# Altium PCB LEOPARD_HD4.PcbDoc (part 1 of 3)
Units mil, origin at the board's own origin, x right, y up, seen from the top; angles counter-clockwise.
Board outline 2678.03 x 1898.03 mil, 4 copper layers (L1, L2, L3, L4), stack 207.302 mil thick; 147 components, 116 nets, 618 pads, 284 vias.
Unrouted connection lines stored in the file: 3.
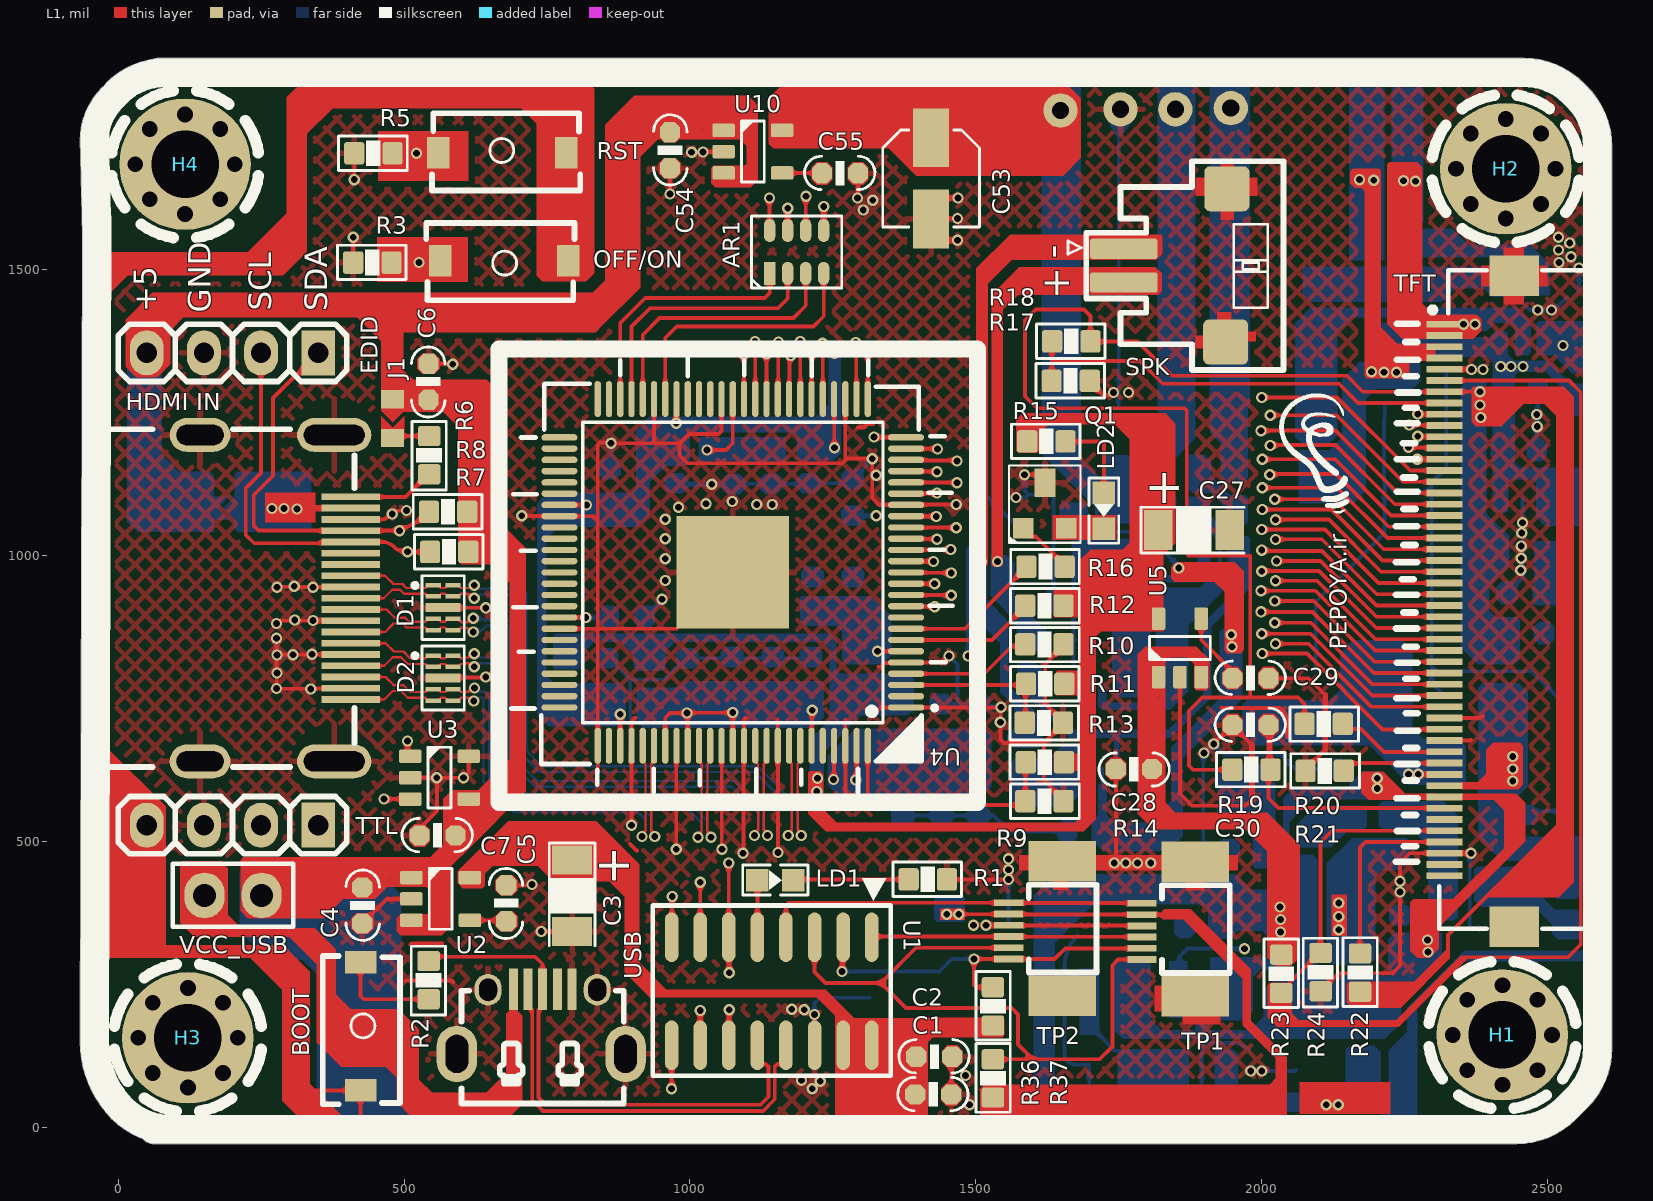
[diagram p0: L1 view]
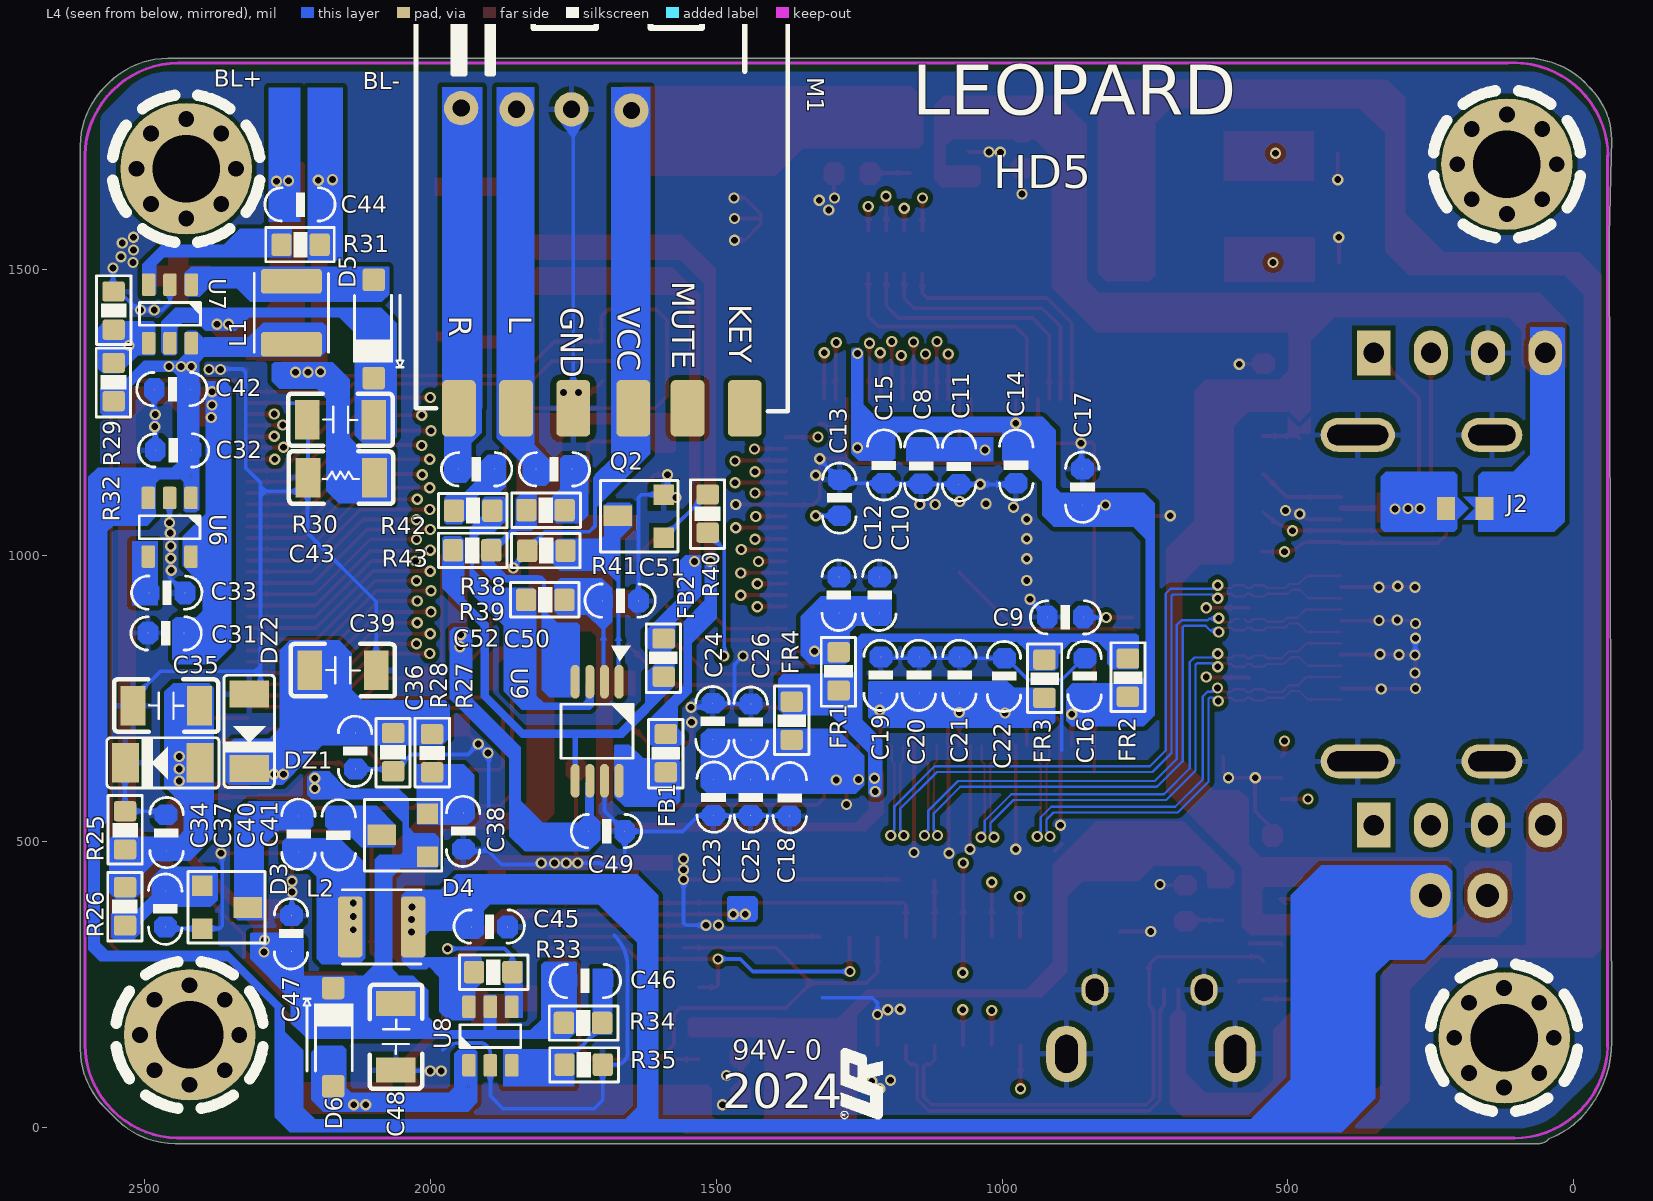
[diagram p1: L4 view, seen from below]
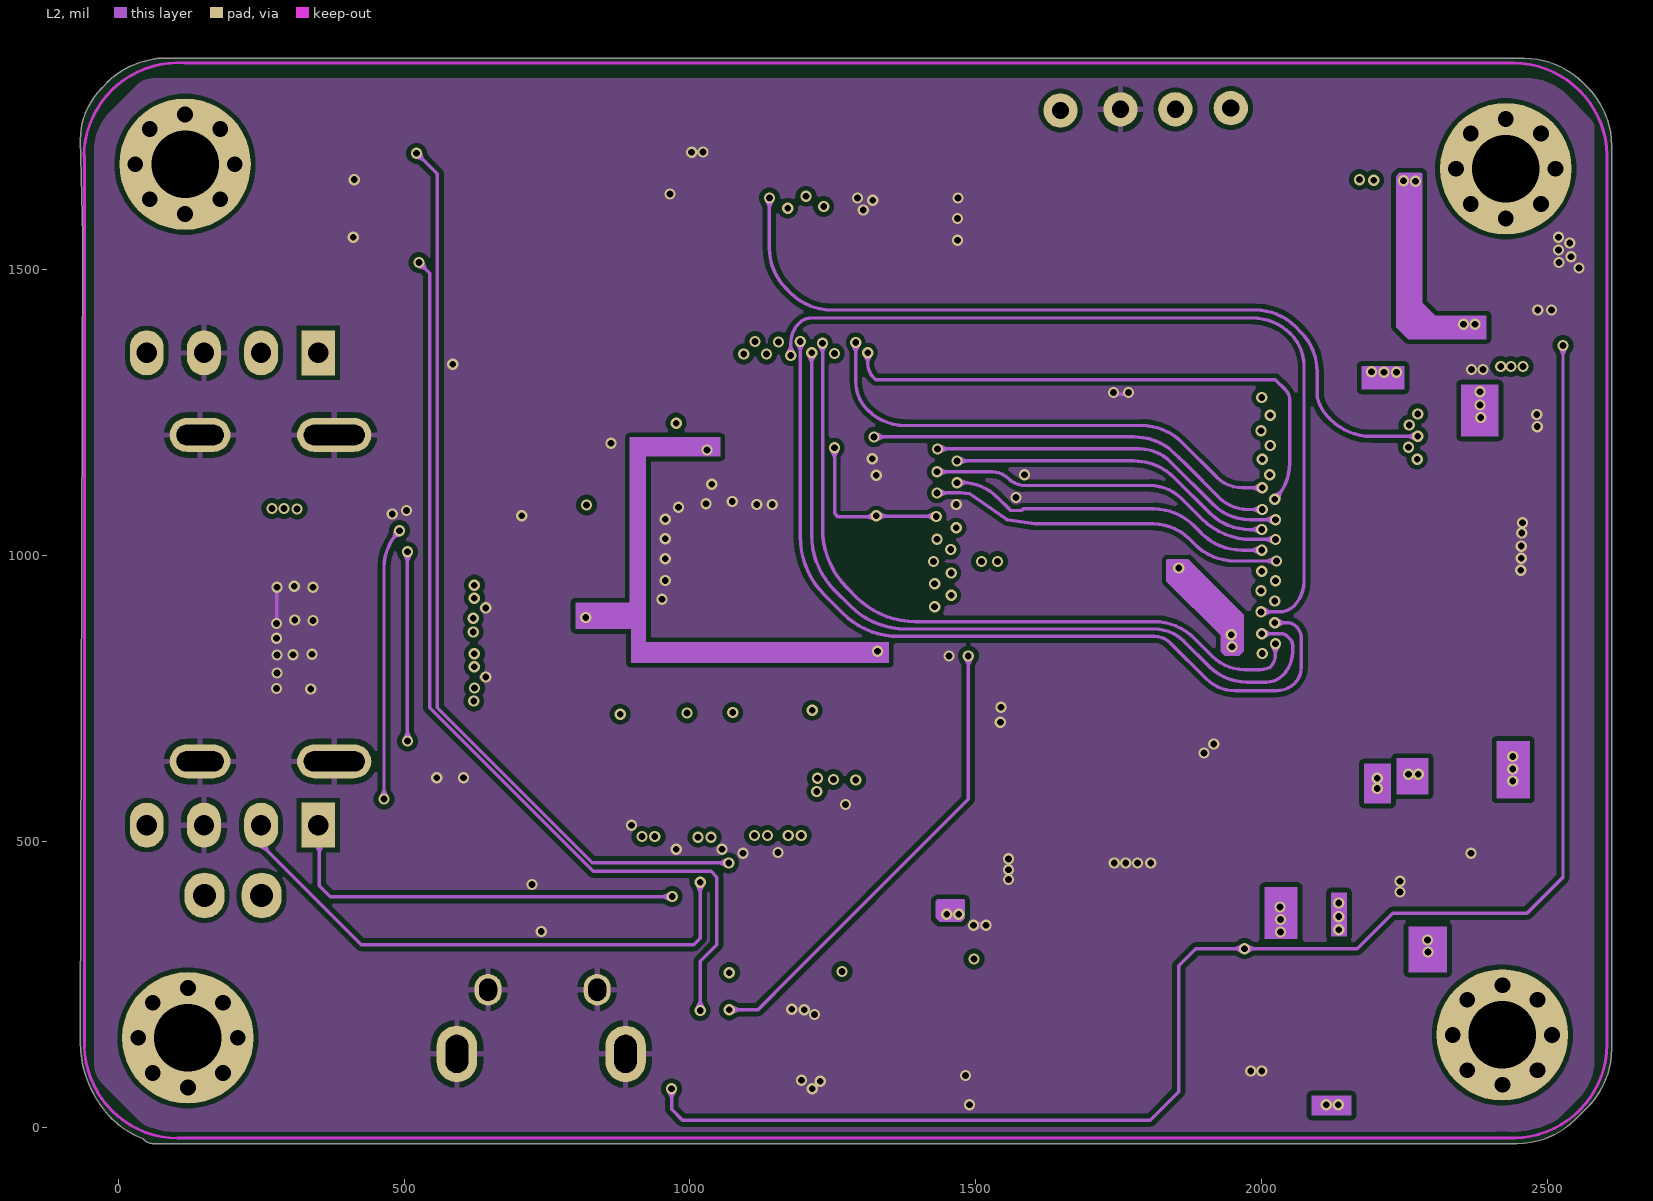
[diagram p2: L2]
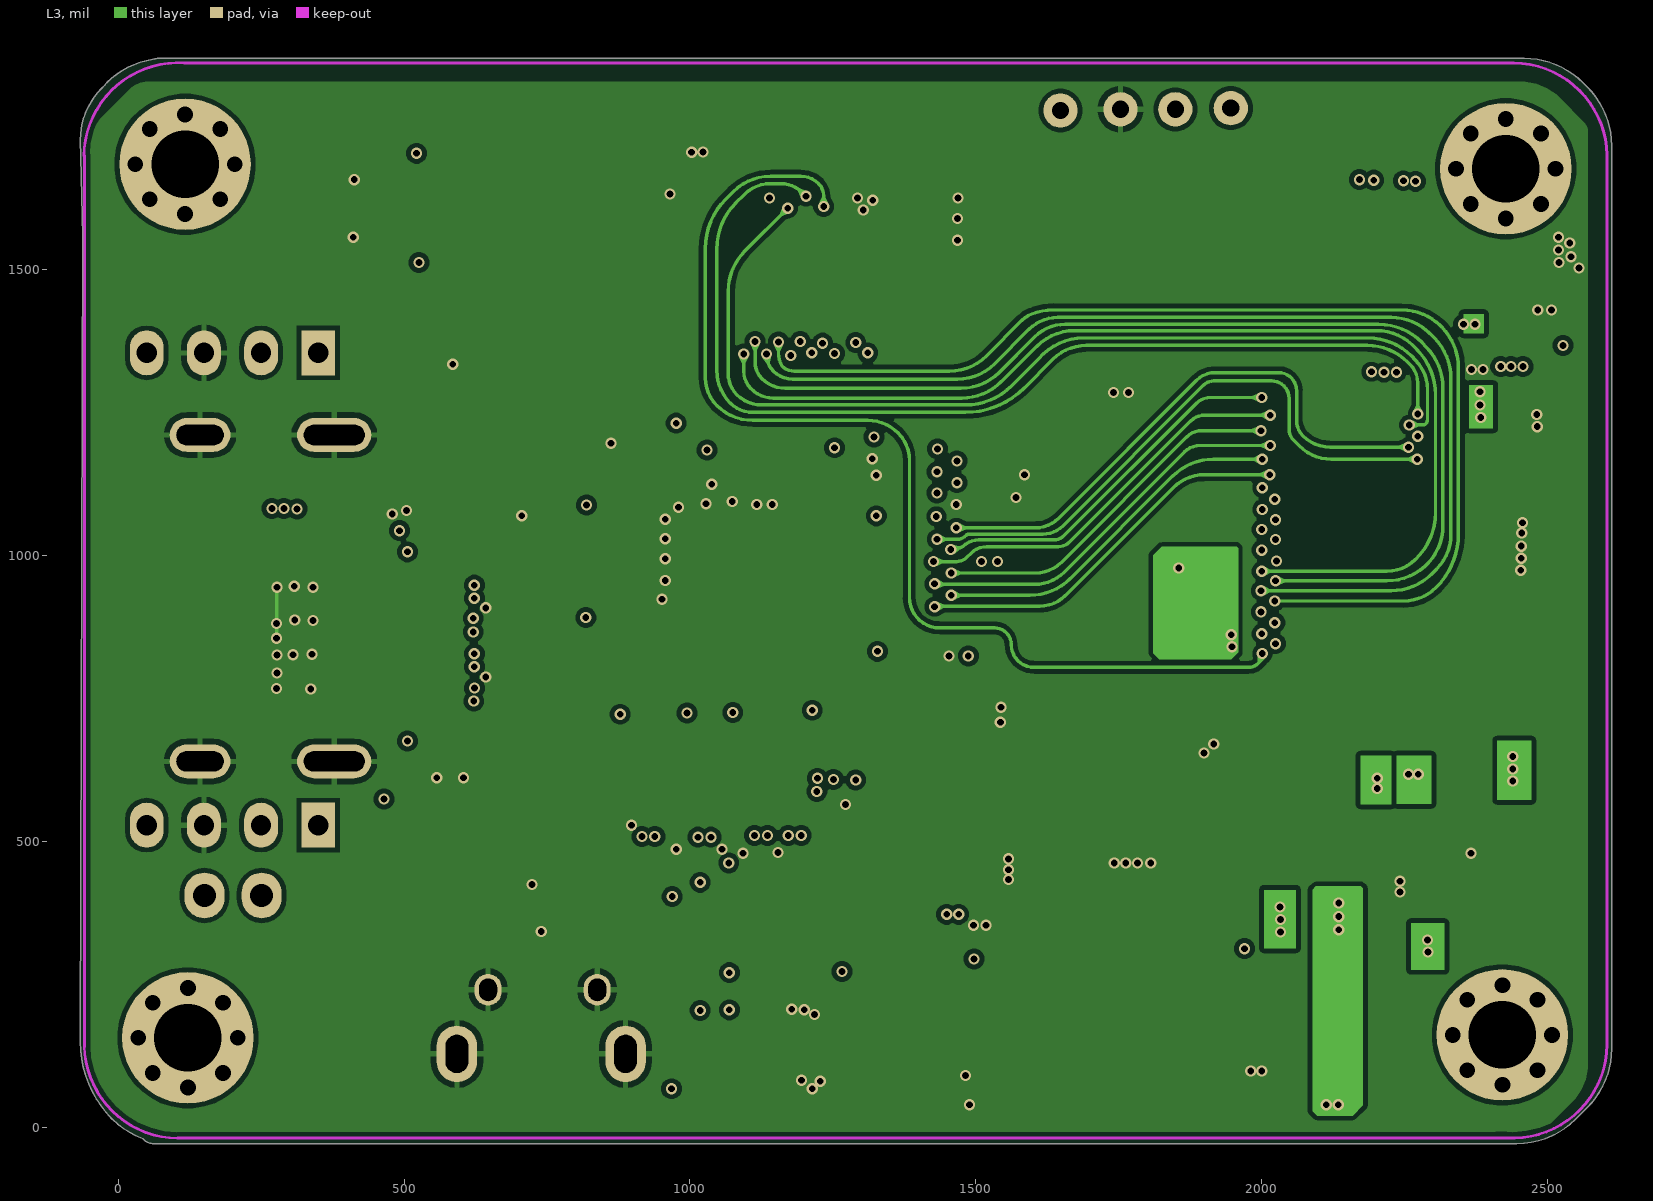
[diagram p3: L3]

## Layer stack, top to bottom
Top Solder: solder mask 1.2, Solder Resist, Dk 3.5
L1: signal copper 1.2
Dielectric 2: prepreg 4, PP-022, Dk 4.6
Dielectric4: dielectric 12.6, FR-4, Dk 4.8
L2: signal copper 1.6
Dielectric 1: core 181.102, Core-042, Dk 4.6
L3: signal copper 1.6
Dielectric 3: prepreg 4, PP-022, Dk 4.6
L4: signal copper 1.2
Bottom Solder: solder mask 1.2, Solder Resist, Dk 3.5

## Board outline
-66.02,148.88 -62.1,1558.77 -65.01,1697.3 -66,1725.7 -66.01,1726.57 cw(c61.43,1726.57) -28.69,1816.69 -23.72,1821.66 cw(c-2.36,1808.64) -20.04,1826.33 cw(c83,1723.29) 61.02,1867.35 cw(c70,1844) 70,1869.01 83.1,1869.01 2459,1869.01 cw(c2459,1723.29) 2562.04,1826.33 2569.33,1819.04 cw(c2466.29,1716) 2612.02,1716 2612.02,137 cw(c2466.29,137) 2569.33,33.96 2549.04,13.67 cw(c2446,116.71) 2446,-29.02 62,-29.02 cw(c62,-4) 42.87,-20.12 cw(c93,116.71) -10.04,13.67 -10.14,13.76 cw(c125.08,148.8)

## Design rules (kind name [scope] priority, off if disabled: settings)
Clearance [All] p1: gap=8 ignorepadtopadclearanceinfootprint=FALSE
DiffPairsRouting "Schematic Differential Pairs Routing_8" [InNet('DATA_P')] p1: maxlimit=4.71 minlimit=4.71 mostfreqgap=4.71 toplayer_minwidth=6.35 toplayer_maxwidth=6.35 toplayer_prefwidth=6.35 midlayer1_minwidth=15 midlayer1_maxwidth=15 midlayer1_prefwidth=15 midlayer2_minwidth=15 midlayer2_maxwidth=15 midlayer2_prefwidth=15 bottomlayer_minwidth=6.35 bottomlayer_maxwidth=6.35 bottomlayer_prefwidth=6.35 impedanceprofiledriven=TRUE maxuncoupledlength=500
DiffPairsRouting "Schematic Differential Pairs Routing_6" [InNet('DATA_N')] p2: maxlimit=4.71 minlimit=4.71 mostfreqgap=4.71 toplayer_minwidth=6.35 toplayer_maxwidth=6.35 toplayer_prefwidth=6.35 midlayer1_minwidth=15 midlayer1_maxwidth=15 midlayer1_prefwidth=15 midlayer2_minwidth=15 midlayer2_maxwidth=15 midlayer2_prefwidth=15 bottomlayer_minwidth=6.35 bottomlayer_maxwidth=6.35 bottomlayer_prefwidth=6.35 impedanceprofiledriven=TRUE maxuncoupledlength=500
DiffPairsRouting DATA_USB [InDifferentialPair('DATA')] p3: maxlimit=10 minlimit=6 mostfreqgap=10 toplayer_maxgap=6 toplayer_prefgap=6 toplayer_minwidth=4.04 toplayer_maxwidth=4.04 toplayer_prefwidth=4.04 bottomlayer_maxgap=6 bottomlayer_prefgap=6 bottomlayer_minwidth=4.04 bottomlayer_maxwidth=4.04 bottomlayer_prefwidth=4.04 impedanceprofiledriven=TRUE impedanceprofileid={DC6255A4-8423-474A-A1B0-59CB127E8DA4} impedanceprofilevalue=100.000000 maxuncoupledlength=500
DiffPairsRouting DiffPairsRouting_4 [InDifferentialPairClass('TX2')] p4: maxlimit=6 minlimit=5.91 mostfreqgap=6 toplayer_mingap=6 toplayer_minwidth=4.04 toplayer_maxwidth=4.04 toplayer_prefwidth=4.04 bottomlayer_mingap=6 bottomlayer_minwidth=4.04 bottomlayer_maxwidth=4.04 bottomlayer_prefwidth=4.04 impedanceprofiledriven=TRUE impedanceprofileid={DC6255A4-8423-474A-A1B0-59CB127E8DA4} impedanceprofilevalue=100.000000 maxuncoupledlength=500
DiffPairsRouting DiffPairsRouting_3 [InDifferentialPairClass('DIF3')] p5: maxlimit=6 minlimit=5.91 mostfreqgap=6 toplayer_mingap=6 toplayer_minwidth=4.04 toplayer_maxwidth=4.04 toplayer_prefwidth=4.04 bottomlayer_mingap=6 bottomlayer_minwidth=4.04 bottomlayer_maxwidth=4.04 bottomlayer_prefwidth=4.04 impedanceprofiledriven=TRUE impedanceprofileid={DC6255A4-8423-474A-A1B0-59CB127E8DA4} impedanceprofilevalue=100.000000 maxuncoupledlength=500
DiffPairsRouting DiffPairsRouting_2 [OnLayer('TOP') And InDifferentialPairClass('All Differential Pairs')] p6: maxlimit=6 minlimit=5.91 mostfreqgap=6 toplayer_mingap=6 toplayer_minwidth=4.04 toplayer_maxwidth=4.04 toplayer_prefwidth=4.04 bottomlayer_mingap=6 bottomlayer_minwidth=4.04 bottomlayer_maxwidth=4.04 bottomlayer_prefwidth=4.04 impedanceprofiledriven=TRUE impedanceprofileid={DC6255A4-8423-474A-A1B0-59CB127E8DA4} impedanceprofilevalue=100.000000 maxuncoupledlength=500
DiffPairsRouting DiffPairsRouting_1 [InDifferentialPairClass('DIF1')] p7: maxlimit=6 minlimit=5.91 mostfreqgap=6 toplayer_mingap=6 toplayer_minwidth=4.04 toplayer_maxwidth=4.04 toplayer_prefwidth=4.04 bottomlayer_mingap=6 bottomlayer_minwidth=4.04 bottomlayer_maxwidth=4.04 bottomlayer_prefwidth=4.04 impedanceprofiledriven=TRUE impedanceprofileid={DC6255A4-8423-474A-A1B0-59CB127E8DA4} impedanceprofilevalue=100.000000 maxuncoupledlength=500
DiffPairsRouting RX_3 [InDifferentialPair('RXC')] p8: maxlimit=6 minlimit=5.91 mostfreqgap=6 toplayer_mingap=6 toplayer_minwidth=4.04 toplayer_maxwidth=4.04 toplayer_prefwidth=4.04 bottomlayer_mingap=6 bottomlayer_minwidth=4.04 bottomlayer_maxwidth=4.04 bottomlayer_prefwidth=4.04 impedanceprofiledriven=TRUE impedanceprofileid={DC6255A4-8423-474A-A1B0-59CB127E8DA4} impedanceprofilevalue=100.000000 maxuncoupledlength=500
DiffPairsRouting RX_2 [InDifferentialPair('RX2')] p9: maxlimit=6 minlimit=5.91 mostfreqgap=6 toplayer_mingap=6 toplayer_minwidth=4.04 toplayer_maxwidth=4.04 toplayer_prefwidth=4.04 bottomlayer_mingap=6 bottomlayer_minwidth=4.04 bottomlayer_maxwidth=4.04 bottomlayer_prefwidth=4.04 impedanceprofiledriven=TRUE impedanceprofileid={DC6255A4-8423-474A-A1B0-59CB127E8DA4} impedanceprofilevalue=100.000000 maxuncoupledlength=500
DiffPairsRouting RX_1 [InDifferentialPair('RX1')] p10: maxlimit=6 minlimit=5.91 mostfreqgap=6 toplayer_mingap=6 toplayer_minwidth=4.04 toplayer_maxwidth=4.04 toplayer_prefwidth=4.04 bottomlayer_mingap=6 bottomlayer_minwidth=4.04 bottomlayer_maxwidth=4.04 bottomlayer_prefwidth=4.04 impedanceprofiledriven=TRUE impedanceprofileid={DC6255A4-8423-474A-A1B0-59CB127E8DA4} impedanceprofilevalue=100.000000 maxuncoupledlength=500
DiffPairsRouting RX0 [InDifferentialPair('RX0')] p11: maxlimit=6 minlimit=5.91 mostfreqgap=6 toplayer_mingap=6 toplayer_minwidth=4.04 toplayer_maxwidth=4.04 toplayer_prefwidth=4.04 bottomlayer_mingap=6 bottomlayer_minwidth=4.04 bottomlayer_maxwidth=4.04 bottomlayer_prefwidth=4.04 impedanceprofiledriven=TRUE impedanceprofileid={DC6255A4-8423-474A-A1B0-59CB127E8DA4} impedanceprofilevalue=100.000000 maxuncoupledlength=500
DiffPairsRouting HDMI_2 [InDifferentialPair('HDMI2')] p12: maxlimit=6 minlimit=5.91 mostfreqgap=6 toplayer_mingap=6 toplayer_minwidth=4.04 toplayer_maxwidth=4.04 toplayer_prefwidth=4.04 bottomlayer_mingap=6 bottomlayer_minwidth=4.04 bottomlayer_maxwidth=4.04 bottomlayer_prefwidth=4.04 impedanceprofiledriven=TRUE impedanceprofileid={DC6255A4-8423-474A-A1B0-59CB127E8DA4} impedanceprofilevalue=100.000000 maxuncoupledlength=500
DiffPairsRouting HDMI_1 [InDifferentialPair('HDMI1')] p13: maxlimit=6 minlimit=5.91 mostfreqgap=6 toplayer_mingap=6 toplayer_minwidth=4.04 toplayer_maxwidth=4.04 toplayer_prefwidth=4.04 bottomlayer_mingap=6 bottomlayer_minwidth=4.04 bottomlayer_maxwidth=4.04 bottomlayer_prefwidth=4.04 impedanceprofiledriven=TRUE impedanceprofileid={DC6255A4-8423-474A-A1B0-59CB127E8DA4} impedanceprofilevalue=100.000000 maxuncoupledlength=500
DiffPairsRouting HDMI_0 [InDifferentialPair('HDMI0')] p14: maxlimit=6 minlimit=5.91 mostfreqgap=6 toplayer_mingap=6 toplayer_minwidth=4.04 toplayer_maxwidth=4.04 toplayer_prefwidth=4.04 bottomlayer_mingap=6 bottomlayer_minwidth=4.04 bottomlayer_maxwidth=4.04 bottomlayer_prefwidth=4.04 impedanceprofiledriven=TRUE impedanceprofileid={DC6255A4-8423-474A-A1B0-59CB127E8DA4} impedanceprofilevalue=100.000000 maxuncoupledlength=500
DiffPairsRouting HDMI_ [InDifferentialPair('HDMI')] p15: maxlimit=6 minlimit=5.91 mostfreqgap=6 toplayer_mingap=6 toplayer_minwidth=4.04 toplayer_maxwidth=4.04 toplayer_prefwidth=4.04 bottomlayer_mingap=6 bottomlayer_minwidth=4.04 bottomlayer_maxwidth=4.04 bottomlayer_prefwidth=4.04 impedanceprofiledriven=TRUE impedanceprofileid={DC6255A4-8423-474A-A1B0-59CB127E8DA4} impedanceprofilevalue=100.000000 maxuncoupledlength=500
DiffPairsRouting [InDifferentialPairClass('DIF1')] p16: maxlimit=6 minlimit=5.91 mostfreqgap=6 toplayer_mingap=6 toplayer_minwidth=4.04 toplayer_maxwidth=4.04 toplayer_prefwidth=4.04 bottomlayer_mingap=6 bottomlayer_minwidth=4.04 bottomlayer_maxwidth=4.04 bottomlayer_prefwidth=4.04 impedanceprofiledriven=TRUE impedanceprofileid={DC6255A4-8423-474A-A1B0-59CB127E8DA4} impedanceprofilevalue=100.000000 maxuncoupledlength=500
MatchedLengths "Schematic Matched Net Lengths_54" [InNet('HDMI0_P')] p1: tolerance=1000 checknetsindiffpair=TRUE checkdiffpairvsdiffpair=FALSE checkxsignals=FALSE checkothers=FALSE
MatchedLengths "Schematic Matched Net Lengths_53" [InNet('HDMI_P')] p2: tolerance=1000 checknetsindiffpair=TRUE checkdiffpairvsdiffpair=FALSE checkxsignals=FALSE checkothers=FALSE
MatchedLengths "Schematic Matched Net Lengths_52" [InNet('HDMI_N')] p3: tolerance=1000 checknetsindiffpair=TRUE checkdiffpairvsdiffpair=FALSE checkxsignals=FALSE checkothers=FALSE
MatchedLengths "Schematic Matched Net Lengths_51" [InNet('HDMI2_P')] p4: tolerance=1000 checknetsindiffpair=TRUE checkdiffpairvsdiffpair=FALSE checkxsignals=FALSE checkothers=FALSE
MatchedLengths "Schematic Matched Net Lengths_50" [InNet('HDMI1_N')] p5: tolerance=1000 checknetsindiffpair=TRUE checkdiffpairvsdiffpair=FALSE checkxsignals=FALSE checkothers=FALSE
MatchedLengths "Schematic Matched Net Lengths_49" [InNet('HDMI1_P')] p6: tolerance=1000 checknetsindiffpair=TRUE checkdiffpairvsdiffpair=FALSE checkxsignals=FALSE checkothers=FALSE
MatchedLengths "Schematic Matched Net Lengths_48" [InNet('HDMI0_N')] p7: tolerance=1000 checknetsindiffpair=TRUE checkdiffpairvsdiffpair=FALSE checkxsignals=FALSE checkothers=FALSE
MatchedLengths "Schematic Matched Net Lengths_37" [InNet('HDMI2_N')] p8: tolerance=1000 checknetsindiffpair=TRUE checkdiffpairvsdiffpair=FALSE checkxsignals=FALSE checkothers=FALSE
MatchedLengths "Schematic Matched Net Lengths_36" [InNetClass('LTDC_B[0..7]')] p9: tolerance=500 checknetsindiffpair=FALSE checkdiffpairvsdiffpair=TRUE checkxsignals=TRUE checkothers=TRUE
MatchedLengths "Schematic Matched Net Lengths_30" [InNetClass('LTDC_R[0..7]')] p10: tolerance=500 checknetsindiffpair=FALSE checkdiffpairvsdiffpair=TRUE checkxsignals=TRUE checkothers=TRUE
MatchedLengths "Schematic Matched Net Lengths_29" [InNetClass('LTDC_G[0..7]')] p11: tolerance=500 checknetsindiffpair=FALSE checkdiffpairvsdiffpair=TRUE checkxsignals=TRUE checkothers=TRUE
MatchedLengths "Schematic Matched Net Lengths_27" [InNet('HDMI1_N')] p12: tolerance=100 checknetsindiffpair=TRUE checkdiffpairvsdiffpair=FALSE checkxsignals=FALSE checkothers=FALSE
MatchedLengths "Schematic Matched Net Lengths_26" [InNet('HDMI0_N')] p13: tolerance=100 checknetsindiffpair=TRUE checkdiffpairvsdiffpair=FALSE checkxsignals=FALSE checkothers=FALSE
MatchedLengths "Schematic Matched Net Lengths_25" [InNet('HDMI2_N')] p14: tolerance=100 checknetsindiffpair=TRUE checkdiffpairvsdiffpair=FALSE checkxsignals=FALSE checkothers=FALSE
MatchedLengths "Schematic Matched Net Lengths_20" [InNet('HDMI_N')] p15: tolerance=100 checknetsindiffpair=TRUE checkdiffpairvsdiffpair=FALSE checkxsignals=FALSE checkothers=FALSE
MaxMinImpedance "Schematic Impedance Constraint_28" [InNet('HDMI_N')] p1: minimum=0.000 maximum=100.0
MaxMinImpedance "Schematic Impedance Constraint_27" [InNet('HDMI0_N')] p2: minimum=0.000 maximum=100.0
MaxMinImpedance "Schematic Impedance Constraint_22" [InNet('HDMI2_N')] p3: minimum=0.000 maximum=100.0
MaxMinImpedance "Schematic Impedance Constraint_14" [InNet('HDMI1_N')] p4: minimum=0.000 maximum=100.0
PlaneConnect [All] p1: pad.planeconnectstyle=Relief pad.reliefexpansion=20 pad.reliefentries=4 pad.reliefconductorwidth=10 pad.reliefairgap=10 via.planeconnectstyle=Direct via.reliefexpansion=20 via.reliefentries=4 via.reliefconductorwidth=10 via.reliefairgap=10
PolygonConnect [All] p1: thpad.connectstyle=Relief thpad.reliefconductorwidth=10 thpad.reliefentries=4 thpad.polygonreliefangle="90 Angle" thpad.airgapwidth=10 smdpad.connectstyle=Relief smdpad.reliefconductorwidth=10 smdpad.reliefentries=4 smdpad.polygonreliefangle="90 Angle" smdpad.airgapwidth=10 via.connectstyle=Direct via.reliefconductorwidth=10 via.reliefentries=4 via.polygonreliefangle="90 Angle" via.airgapwidth=10
RoutingVias [All] p1: holewidth=11.81 width=19.68 viastyle="Through Hole" minholewidth=11.81 minwidth=19.68 maxholewidth=11.81 maxwidth=19.68
ShortCircuit [All] p1: allowed=TRUE
SolderMaskExpansion [All] p1: expansion=4 istentingtop=FALSE
UnRoutedNet [All] p1: checkbadconnections=TRUE
UnpouredPolygon [All] p1: allowunpoured=TRUE allowshelved=TRUE
Width [All] p1: maxlimit=7 minlimit=6 preferedwidth=6.64 impedanceprofiledriven=TRUE impedanceprofileid={294B2247-79CF-404E-937C-7CEE070A55E9} impedanceprofilevalue=50.000000 minimp=50.000000 maximp=50.000000 favimp=50.000000
25 further rules are at their usual default settings.

## Classes and differential pairs
component class AUDIO: C49 C50 C51 C52 C53 C54 C55 FB1 FB2 M1 Q2 R38 R39 R40 R41 R42 R43 SPK U9 U10
component class TCP: R36 R37 TP1 TP2 USB VCC_USB
component class MAIN: BOOT C1 C2 C3 C4 C5 H1 H2 H3 H4 LD1 OFF/ON R1 R2 R3 R5 RST TTL U1 U2
component class LCD: C30 C31 C32 C33 C34 C35 C36 C37 C38 C39 C40 C41 C42 C43 C44 C45 C46 C47 C48 D3 D4 D5 D6 DZ1 DZ2 L1 L2 R17 R18 R19 R20 R21 R22 R23 R24 R25 R26 R27 R28 R29 R30 R31 R32 R33 R34 R35 TFT U6 U7 U8
net class LTDC_R[0..7]: LTDC_R0 LTDC_R1 LTDC_R2 LTDC_R3 LTDC_R4 LTDC_R5 LTDC_R6 LTDC_R7
net class LTDC_G[0..7]: LTDC_G0 LTDC_G1 LTDC_G2 LTDC_G3 LTDC_G4 LTDC_G5 LTDC_G6 LTDC_G7
net class LTDC_B[0..7]: LTDC_B0 LTDC_B1 LTDC_B2 LTDC_B3 LTDC_B4 LTDC_B5 LTDC_B6 LTDC_B7
component class TFP401: AR1 C6 C7 C8 C9 C10 C11 C12 C13 C14 C15 C16 C17 C18 C19 C20 C21 C22 C23 C24 C25 C26 C27 C28 C29 D1 D2 EDID FR1 FR2 FR3 FR4 "HDMI IN" J1 J2 LD2 Q1 R6 R7 R8 R9 R10 R11 R12 R13 R14 R15 R16 U3 U4 U5
differential pair DATA: +DATA_P -DATA_N
differential pair HDMI: +HDMI_P -HDMI_N
differential pair HDMI2: +HDMI2_P -HDMI2_N
differential pair HDMI1: +HDMI1_P -HDMI1_N
differential pair HDMI0: +HDMI0_P -HDMI0_N

## Components (designator, comment, footprint, x,y, rotation, side; value= is the part's Value field where it differs from the comment)
AR1 "470R" 1206-ARRAY-4-GENERIC 1139.5,1494 r90 top
BOOT "SW3" "TACTILE SWITCH" 425,177 r270 top
C1 "" CAPACITOR_0603_CURVE#1 1369.65,95.83 r0 top
C2 "" CAPACITOR_0603_CURVE#1 1367.65,29.83 r0 top
C3 "" "CAP TAN CASE A" 794,467 r270 top value=10UF
C4 "100NF" CAPACITOR_0603_CURVE#1 399.83,445.34 r270 top value=47pF
C5 "10NF" CAPACITOR_0603_CURVE#1 706.17,333.65 r90 top value=47pF
C6 "100NF" CAPACITOR_0603_CURVE#1 570.17,1245.65 r90 top value=47pF
C7 "100NF" CAPACITOR_0603_CURVE#1 500.66,482.83 r0 top value=47pF
C8 "" CAPACITOR_0603_CURVE#2 1169.17,1214.35 r270 bottom value=4.7UF
C9 "" CAPACITOR_0603_CURVE#2 831.66,919.17 r0 bottom value=10UF
C10 "100NF" CAPACITOR_0603_CURVE#2 1186.83,872.65 r90 bottom value=47pF
C11 "100NF" CAPACITOR_0603_CURVE#2 1103.17,1213.35 r270 bottom value=47pF
C12 "10NF" CAPACITOR_0603_CURVE#2 1257.83,872.65 r90 bottom value=47pF
C13 "100NF" CAPACITOR_0603_CURVE#2 1256.83,1042.65 r90 bottom value=47pF
C14 "100NF" CAPACITOR_0603_CURVE#2 1003.17,1215.34 r270 bottom value=47pF
C15 "100NF" CAPACITOR_0603_CURVE#2 1234.17,1215.34 r270 bottom value=47pF
C16 "100NF" CAPACITOR_0603_CURVE#2 827.83,730.65 r90 bottom value=47pF
C17 "" CAPACITOR_0603_CURVE#2 831.83,1061.66 r90 bottom value=10UF
C18 "100NF" CAPACITOR_0603_CURVE#2 1399.17,633.34 r270 bottom value=47pF
C19 "100NF" CAPACITOR_0603_CURVE#2 1184.83,732.65 r90 bottom value=47pF
C20 "100NF" CAPACITOR_0603_CURVE#2 1117.83,732.65 r90 bottom value=47pF
C21 "100NF" CAPACITOR_0603_CURVE#2 1046.83,732.65 r90 bottom value=47pF
C22 "" CAPACITOR_0603_CURVE#2 968.83,730.65 r90 bottom value=10UF
C23 "100NF" CAPACITOR_0603_CURVE#2 1532.17,634.35 r270 bottom value=47pF
C24 "100NF" CAPACITOR_0603_CURVE#2 1478.83,651.66 r90 bottom value=47pF
C25 "100NF" CAPACITOR_0603_CURVE#2 1467.17,634.35 r270 bottom value=47pF
C26 "" CAPACITOR_0603_CURVE#2 1411.83,650.66 r90 bottom value=10UF
C27 "" "CAP TAN CASE A" 1819,1044 r0 top value=10UF
C28 "100NF" CAPACITOR_0603_CURVE#1 1834.35,653.17 r180 top value=47pF
C29 "10NF" CAPACITOR_0603_CURVE#1 1922.65,757.83 r0 top value=47pF
C30 "approved sub OK" CAPACITOR_0603_CURVE#1 1922.66,675.83 r0 top value=100NF
C31 "10UF" CAPACITOR_0603_CURVE#2 2404.66,891.17 r0 bottom value=47pF
C32 "100NF" CAPACITOR_0603_CURVE#2 2391.65,1211.17 r0 bottom value=47pF
C33 "10NF" CAPACITOR_0603_CURVE#2 2518.35,906.83 r180 bottom value=47pF
C34 "approved sub OK" CAPACITOR_0603_CURVE#2 2489.17,572.34 r270 bottom value=10NF
C35 "" "CAP1206 - DUPLICATE" 2459,733 r180 bottom value=1UF
C36 "approved sub OK" CAPACITOR_0603_CURVE#2 2103.83,599.66 r90 bottom value=10NF
C37 "100NF" CAPACITOR_0603_CURVE#2 2435.83,323.66 r90 bottom value=100nF
C38 "1UF" CAPACITOR_0603_CURVE#2 1914.83,459.66 r90 bottom value=100nF
C39 "" "CAP1206 - DUPLICATE" 2150,795 r180 bottom value=1UF
C40 "100NF" CAPACITOR_0603_CURVE#2 2202.83,454.66 r90 bottom value=100nF
C41 "100NF" CAPACITOR_0603_CURVE#2 2188.17,568.34 r270 bottom value=100nF
C42 "100NF" CAPACITOR_0603_CURVE#2 2509.35,1262.83 r180 bottom value=47pF
C43 "100NF" "CAP1206 - DUPLICATE" 2160,1241 r0 bottom
C44 "22PF" CAPACITOR_0603_CURVE#2 2285.34,1585.83 r180 bottom value=47pF
C45 "approved sub OK" CAPACITOR_0603_CURVE#2 1954.34,322.83 r180 bottom value=10NF
C46 "22PF" CAPACITOR_0603_CURVE#2 1671.65,283.17 r0 bottom value=100nF
C47 "approved sub OK" CAPACITOR_0603_CURVE#2 2215.83,280.65 r90 bottom value=100NF
C48 "" "CAP1206 - DUPLICATE" 2064,155 r270 bottom value=10UF
C49 "1UF" CAPACITOR_0603_CURVE#2 1749.34,489.83 r180 bottom value=47pF
C50 "1UF" CAPACITOR_0603_CURVE#2 1725.66,1178.17 r0 bottom value=47pF
C51 "1UF" CAPACITOR_0603_CURVE#2 1725.34,892.83 r180 bottom value=47pF
C52 "1UF" CAPACITOR_0603_CURVE#2 1861.66,1178.17 r0 bottom value=47pF
C53 "" "WCAP-ASLU 4x5.5x1" 1422,1659 r270 top value=10UF
C54 "100NF" CAPACITOR_0603_CURVE#1 937.83,1766.34 r270 top value=47pF
C55 "10NF" CAPACITOR_0603_CURVE#1 1204.66,1640.83 r0 top value=47pF
D1 "RClamp0524PATCT" DIOD_TVS 566.22,907.32 r270 top
D2 "RClamp0524PATCT" DIOD_TVS 566.22,784.32 r270 top
D3 "BAT54S" SOT23-123 2399,422 r180 bottom
D4 "BAT54S" SOT23-123 2005,473 r0 bottom
D5 "MBR140SFT1G" SOD123 2099,1397 r90 bottom
D6 "MBR140SFT1G" SOD123 2170,156 r270 bottom
DZ1 "7.5V" "DIODE 1N4148 SMD" 2403,637 r0 bottom
DZ2 "16V" "DIODE 1N4148 SMD" 2317,757 r270 bottom
EDID "HDR1X4" MHDR1X04-254P 350,1354 r180 top (schematic designator EDID1)
FB1 "Ferrite Chip" indicator 1589,654 r90 bottom
FB2 "Ferrite Chip" indicator 1593,821 r90 bottom
FR1 "100R" indicator 1287,797 r90 bottom
FR2 "100R" indicator 779,786 r270 bottom
FR3 "100R" indicator 925,784 r270 bottom
FR4 "100R" indicator 1367,710.54 r270 bottom
H1 "Round Pad" P3.0CH 2421,161 r0 top
H2 "Round Pad" P3.0CH 2427,1676 r0 top
H3 "Round Pad" P3.0CH 122,156 r0 top
H4 "Round Pad" P3.0CH 117,1684 r0 top
"HDMI IN" "685119135725" HDMI 213,891 r180 top (schematic designator "HDMI IN1")
J1 "JUMP" SB_0603 480,1239 r90 top
J2 "JUMP" SB_0603 190,1082 r0 bottom
L1 "4.7UH/0420" INDC3225X170N 2243,1424 r270 bottom
L2 "Inductor" INDC3225X170N 2085,350 r0 bottom value=4.7UH
LD1 "LED_green" LED_0603 1149.5,432 r0 top value=GREEN
LD2 "LED_red" LED_0603 1724,1078 r270 top value=RED
M1 "M18" MH-M18 1705,1657 r270 bottom
OFF/ON "SW1" "TACTILE SWITCH" 676,1514 r180 top
Q1 "BC857" SOT23-BCE 1583,1047 r90 top
Q2 "S8050" SOT23-123 1592,1031 r0 bottom
R1 "1K" RESISTOR_0603 1353.25,405.73 r0 top value=10k
R2 "10K" RESISTOR_0603 570.27,194.25 r90 top value=10k
R3 "10K" RESISTOR_0603 381.72,1484.73 r0 top value=10k
R5 "10K" RESISTOR_0603 383.72,1675.73 r0 top value=10k
R6 "10K" RESISTOR_0603 571.27,1112.25 r90 top value=10k
R7 "10K" RESISTOR_0603 516.25,978.73 r0 top value=10k
R8 "10K" RESISTOR_0603 514.25,1048.73 r0 top value=10k
R9 "10K" RESISTOR_0603 1682.75,597.27 r180 top value=10k
R10 "10K" RESISTOR_0603 1682.75,871.27 r180 top value=10k
R11 "10K" RESISTOR_0603 1558.72,747.73 r0 top value=10k
R12 "10K" RESISTOR_0603 1682.75,939.27 r180 top value=10k
R13 "10K" RESISTOR_0603 1681.75,734.27 r180 top value=10k
R14 "10K" RESISTOR_0603 1558.25,610.73 r0 top value=10k
R15 "1K" RESISTOR_0603 1560.72,1171.73 r0 top value=10k
R16 "1K" RESISTOR_0603 1559.25,952.73 r0 top value=10k
R17 "0R" RESISTOR_0603 1604.25,1346.73 r0 top value=12K1
R18 "10K" RESISTOR_0603 1603.25,1277.73 r0 top value=12K1
R19 "10K" RESISTOR_0603 1919.25,597.73 r0 top value=12K1
R20 "10K" RESISTOR_0603 2171.21,732.27 r180 top value=12K1
R21 "10K" RESISTOR_0603 2172.75,650.27 r180 top value=12K1
R22 "10K" RESISTOR_0603 2144.73,332.75 r270 top value=12K1
R23 "2.2K" RESISTOR_0603 2006.73,330.75 r270 top value=12K1
R24 "10K" RESISTOR_0603 2130.27,208.25 r90 top value=12K1
R25 "51K" RESISTOR_0603 2561.27,581.75 r270 bottom value=12K1
R26 "1K" RESISTOR_0603 2506.73,323.25 r90 bottom value=12K1
R27 "1K" RESISTOR_0603 2024.27,716.75 r270 bottom value=12K1
R28 "51K" RESISTOR_0603 2037.73,592.79 r90 bottom value=12K1
R29 "1K" RESISTOR_0603 2526.73,1240.25 r90 bottom value=10k
R30 "2.7R" RES1206 2157,1132 r180 bottom value=10k
R31 "1K" RESISTOR_0603 2289.75,1515.73 r180 bottom value=10k
R32 "10K" RESISTOR_0603 2581.27,1490.75 r270 bottom value=10k
R33 "10K" RESISTOR_0603 1827.25,298.27 r0 bottom value=12K1
R34 "51K" RESISTOR_0603 1670.25,209.27 r0 bottom value=12K1
R35 "1K" RESISTOR_0603 1669.25,136.27 r0 bottom value=12K1
R36 "10K" RESISTOR_0603 1502.73,147.75 r270 top value=10k
R37 "10K" RESISTOR_0603 1502.73,273.75 r270 top value=10k
R38 "10K" RESISTOR_0603 1859.75,980.73 r180 bottom value=10k
R39 "20K" RESISTOR_0603 1861.75,894.73 r180 bottom value=10k
R40 "1K" RESISTOR_0603 1487.73,1010.25 r90 bottom value=10k
R41 "20K" RESISTOR_0603 1735.79,1106.27 r0 bottom value=10k
R42 "20K" RESISTOR_0603 1987.75,1050.73 r180 bottom value=10k
R43 "20K" RESISTOR_0603 1864,1036 r0 bottom value=10k
RST "SW2" "TACTILE SWITCH" 671,1705 r0 top
SPK "ZH 1X2" "JST 1X2-2MM" 1753,1477 r0 top
TFT "TFT 800X480" FPC50-T_TOP 2469,924 r270 top (schematic designator TFT1)
TP1 "FFC6/PIN" FPC6_P 1879,338 r180 top
TP2 "FFC6/PIN" FPC6_P 1646,339 r180 top
TTL "HDR1X4" MHDR1X04-254P 350,528 r180 top
U1 "CH554G" SO16 1143,237.49 r270 top
U2 "LN1134-3.3V" SOT23-5 564,399 r0 top
U3 "24LC02BT-I/OT" SOT23-5 562,611 r0 top
U4 "TFP410" TFP410 1350,695 r90 top
U5 "LN1134-3.3V" SOT23-5 1857,838 r90 top
U6 "LN1134-3.3V" SOT23-5 2456,1049 r270 bottom
U7 "MP3202(IL6GC)" SOT23-6 2455.4,1422.18 r270 bottom
U8 "AP3031" SOT23-6 1895,159 r90 bottom
U9 "8002B/FT690M" FT690 1746.22,776.21 r270 bottom
U10 "LN1134-3.3V" SOT23-5 1110,1706 r0 top
USB "Micro Input" "USB MICRO" 882.41,48 r90 top
VCC_USB "HEADRE 1X2" "Jumper Small - 2.54 - Black" 201,405 r0 top

## Footprints (in the part's own frame and the unit in brackets; to place one, negate y for a bottom-side part, rotate by r counter-clockwise, add the part's x,y. Pads: shape width x height; smd on the part's side, far side on the other; paste and mask are expansions set on the pad)
1206-ARRAY-4-GENERIC [mil]
  rect 40x20 smd: 1(-1,0)
  oval 40x20 smd: 2(-1,-31.5) 3(-1,-62.99) 4(-1,-94.49) 5(73.99,-94.49) 6(73.99,-62.99) 7(73.99,-31.5) 8(73.99,0)
  silkscreen extent -26,-126 99,31, body extent -6,-113 80,20, height 26
"CAP1206 - DUPLICATE" [mm]
  rect 1.1x1.75 smd: 1(-1.546,0.097) 2(1.404,0.097)
  silkscreen extent -2.39,-1.06 2.24,1.27, body extent -1.72,-0.75 1.58,0.95, height 0.94
"CAP TAN CASE A" [mil]
  rect 50x70 smd: 1(0,0) 2(125,0)
  silkscreen extent -30,-40 150,40, body extent 0,-31 126,31, height 63
CAPACITOR_0603_CURVE#1 [mm]
  oct 0.9x0.9 smd: 1(0.669,0.69) 2(2.269,0.69)
  L1 region: 1.119,0.415 0.894,0.19 0.444,0.19 0.219,0.415 0.219,0.965 0.444,1.19 0.894,1.19 1.119,0.965
  L1 region: 2.719,0.415 2.494,0.19 2.044,0.19 1.819,0.415 1.819,0.965 2.044,1.19 2.494,1.19 2.719,0.965
  silkscreen extent -0.1,-0.03 3.02,1.45, body extent 0.59,0.22 2.34,1.17, height 1
CAPACITOR_0603_CURVE#2 [mm]
  round 0.025 smd: 1(0.669,0.69) 2(2.269,0.69)
  L1 region: 2.719,0.415 2.494,0.19 2.044,0.19 1.819,0.415 1.819,0.965 2.044,1.19 2.494,1.19 2.719,0.965
  L1 region: 1.119,0.415 0.894,0.19 0.444,0.19 0.219,0.415 0.219,0.965 0.444,1.19 0.894,1.19 1.119,0.965
  silkscreen extent -0.1,-0.03 3.02,1.45, body extent 0.59,0.22 2.34,1.17, height 1
DIOD_TVS [mm] "RClamp0524P"
  rect 0.2x0.675 smd: 1(-1.025,-0.387) 2(-0.525,-0.387) 4(0.475,-0.387) 5(0.975,-0.387) 6(0.975,0.488) 7(0.475,0.488) 9(-0.525,0.488) 10(-1.025,0.488)
  rect 0.4x1.55 smd: 3(-0.025,0.051)
  silkscreen extent -1.45,-1.29 1.39,0.99, body extent -1.28,-0.45 1.22,0.55, height 0.65
"DIODE 1N4148 SMD" [mm] "Mini MELF SOD-80"
  rect 1.2x1.75 smd: 1(0,0) 2(3.3,0)
  silkscreen extent -0.84,-1.12 4.14,1.12, body extent -0.13,-0.75 3.37,0.75, height 1.55
FPC6_P [mm] "FPC6_pin_0.5mm"
  rect 1.3x0.3 smd: 1(2.245,1.146) 2(2.245,0.648) 3(2.243,0.142) 4(2.248,-0.351) 5(2.25,-0.848) 6(2.248,-1.354)
  rect 3x1.8 smd: 7(-0.127,2.769) 8(-0.127,-3.2)
  silkscreen extent -1.65,-2.16 1.36,1.74, body extent -3.13,-4.48 3.57,4.22, height 2.1
FPC50-T_TOP [mm] "TFT 7INCH"
  rect 0.3x1.6 smd: 1(-12.197,-3.796) 2(-11.697,-3.796) 3(-11.197,-3.796) 4(-10.697,-3.796) 6(-9.697,-3.796) 7(-9.197,-3.796) 8(-8.697,-3.796) 9(-8.197,-3.796) 10(-7.697,-3.796) 11(-7.197,-3.796) 13(-6.197,-3.796) 14(-5.697,-3.796) 15(-5.197,-3.796) 16(-4.697,-3.796) 17(-4.197,-3.796) 18(-3.697,-3.796) 19(-3.197,-3.796) 20(-2.697,-3.796) 21(-2.197,-3.796) 22(-1.697,-3.796) 23(-1.197,-3.796) 24(-0.697,-3.796) 25(-0.197,-3.796) 26(0.303,-3.796) 27(0.803,-3.796) 28(1.303,-3.796) 29(1.803,-3.796) 30(2.303,-3.796) 31(2.803,-3.796) 32(3.303,-3.796) 33(3.803,-3.796) 34(4.303,-3.796) 35(4.803,-3.796) 37(5.803,-3.796) 38(6.303,-3.796) 39(6.803,-3.796) 40(7.303,-3.796) 41(7.803,-3.796) 42(8.303,-3.796) 43(8.803,-3.796) 44(9.303,-3.796) 45(9.803,-3.796) 46(10.303,-3.796) 47(10.803,-3.796) 48(11.303,-3.796) 50(12.303,-3.796)
  rect 0.3x1.6 smd mask+0.102: 5(-10.197,-3.796) 12(-6.697,-3.796) 36(5.303,-3.796) 49(11.803,-3.796)
  rect 1.8x2.2 smd: 51(14.58,-0.686) 52(-14.351,-0.686)
  silkscreen extent -14.58,-5.94 14.67,2.9, body extent -14.51,-3.68 14.59,2.82, height 2.25
FT690 [mm] "SSOP-8"
  oval 1.5x0.4 smd: 1(-0.066,1.94) 2(-0.066,1.29) 3(-0.066,0.64) 4(-0.066,-0.01) 5(4.334,-0.01) 6(4.334,0.64) 7(4.334,1.29) 8(4.334,1.94)
  silkscreen extent -1.67,-0.63 3.33,2.57, body extent -0.32,-0.53 4.58,2.47, height 1.1
HDMI [mm]
  rect 2.6x0.3 smd paste-100 mask+0.051: 1(-4.929,3.637) 2(-4.929,3.137) 3(-4.929,2.637) 4(-4.929,2.137) 5(-4.929,1.637) 6(-4.929,1.137) 7(-4.929,0.637) 8(-4.929,0.137) 9(-4.929,-0.363) 10(-4.929,-0.863) 11(-4.929,-1.363) 12(-4.929,-1.863) 13(-4.929,-2.363) 14(-4.929,-2.863) 15(-4.929,-3.363) 16(-4.929,-3.863) 17(-4.929,-4.363) 18(-4.929,-4.863) 19(-4.929,-5.363)
  oval 3.3x1.5 hole 0.9 slot 2.7 at 0 deg paste-2539.97 mask+0.051: 20(-4.189,6.387) 20(-4.189,-8.113)
  oval 2.7x1.5 hole 0.9 slot 2.1 at 0 deg paste-2539.97 mask+0.051: 20(1.771,6.387) 20(1.771,-8.113)
  silkscreen extent -5.09,-8.36 6.42,6.64, body extent -5.65,-8.35 6.5,6.65, height 6.36
INDC3225X170N [mm] "Chip Inductor, 2-Leads, Body 3.2x2.5mm, IPC Medium Density"
  round 0.508 on Mech15: 0(0,0)
  rrect25% 1.1x2.7 smd: 1(-1.4,0) 2(1.4,0)
  L1 pour cut-out: -1.125,1.35 -0.825,1.65 0.825,1.65 1.125,1.35 1.125,-1.35 0.825,-1.65 -0.825,-1.65 -1.125,-1.35
  silkscreen extent -1.75,-1.65 1.75,1.65, body extent -1.71,-1.36 1.71,1.36, height 1.7
indicator [mm] "indic_0603"
  round 0.254 on Mech15: 0(0,-0.025)
  rrect25% 0.9x1 smd: 1(-0.85,-0.025) 2(0.85,-0.025)
  L1 pour cut-out: -0.6,0.475 -0.4,0.675 0.4,0.675 0.6,0.475 0.6,-0.525 0.4,-0.725 -0.4,-0.725 -0.6,-0.525
  silkscreen extent -1.55,-0.78 1.5,0.74, body extent -0.87,-0.5 0.88,0.45, height 0.54
"JST 1X2-2MM" [mm] "JST 1X2-2MM"
  rrect25% 3x0.9 smd: 1(0.152,1.499) 2(0.152,0)
  rrect25% 2x2 smd: 3(4.674,-2.642) 3(4.724,4.166)
  silkscreen extent -2.33,-3.89 7.24,5.38, body extent 0.05,-2.27 6.55,3.73, height 3.7
"Jumper Small - 2.54 - Black" [mil] "Designer Abbas Basereh"
  oval 70x80 hole 40: 1(-50,0) 2(50,0)
  silkscreen extent -105,-55 105,55, body extent -100,-50 100,50, height 337
LED_0603 [mm] "SMT LED"
  rect 1x1 smd: 1(-0.8,0) 2(0.8,0)
  silkscreen extent -1.45,-0.66 1.45,0.66, body extent -0.81,-0.4 0.81,0.4, height 0.6
MH-M18 [mm] "BLE Module"
  rrect25% 2.5x1.5 smd: 1(10.16,6.477) 2(10.16,3.937) 3(10.16,1.524) 4(10.16,-1.143) 5(10.16,-3.683) 6(10.16,-6.223)
  silkscreen extent -13.21,-8.13 10.29,8.38, body extent -12.95,-7.87 10.09,8.13, height 2.71
MHDR1X04-254P [mm] "Male Header 1X04 with 2.54 mm Pitch"
  rect 1.5x2 hole 0.9: 1(0,0)
  oval 1.5x2 hole 0.9: 2(2.54,0) 3(5.08,0) 4(7.62,0)
  silkscreen extent -1.27,-1.27 8.89,1.27, body extent -1.27,-1.27 8.89,1.27, height 8.43
P3.0CH [mil] "MOUNTING PAD 3.0 mm, round, 5.8 mm Diameter; with Holes around it"
  round 230 hole 118.11: P(0,0)
  silkscreen extent -128,-128 128,128
RES1206 [mm] "Chip Resistor, 2-Leads, Body 3/20x1/60mm, IPC Medium Density DESIGNER:ABBAS BASEREH"
  rect 1.1x1.75 smd: 1(-1.446,0.09) 2(1.504,0.09)
  silkscreen extent -2.29,-1.07 2.34,1.26, body extent -1.65,-0.76 1.65,0.94, height 0.94
RESISTOR_0603 [mm] "RES_603"
  round 0.254 on Mech15: 0(1.594,0.693)
  rrect25% 0.9x1 smd: 1(0.744,0.693) 2(2.444,0.693)
  L1 pour cut-out: 0.994,1.193 1.194,1.393 1.994,1.393 2.194,1.193 2.194,0.193 1.994,-0.007 1.194,-0.007 0.994,0.193
  silkscreen extent 0.05,-0.06 3.09,1.46, body extent 0.72,0.22 2.47,1.17, height 0.54
SB_0603 [mil] "Jumper"
  rect 32x40 smd: 1(33.75,0) 2(-33.75,0)
  L1 region: -26.25,0 -16.25,0 3.75,-20 -26.25,-20
  L1 region: -26.25,0 -16.25,0 3.75,20 -26.25,20
  L1 region: 23.75,20 13.75,20 -6.25,0 13.75,-20 23.75,-20
SO16 [mm] "SOIC, 16-Leads, Body 9.9x3.9mm, Pitch 1.27mm, IPC Medium Density"
  oval 2.2x0.6 smd: 1(-2.4,4.445) 2(-2.4,3.175) 3(-2.4,1.905) 4(-2.4,0.635) 5(-2.4,-0.635) 6(-2.4,-1.905) 7(-2.4,-3.175) 8(-2.4,-4.445) 9(2.4,-4.445) 10(2.4,-3.175) 11(2.4,-1.905) 12(2.4,-0.635) 13(2.4,0.635) 14(2.4,1.905) 15(2.4,3.175) 16(2.4,4.445)
  silkscreen extent -5.03,-5.28 3.76,5.28, body extent -3.1,-5.08 3.1,5.08, height 1.73
SOD123 [mm] "SOD-123; 2 Leads; Body 2.7 x 1.6 mm, (LxW)"
  round 0.508 on Mech15: 0(0,0)
  rrect25% 1x1 smd: 1(-2.214,0.003) 2(2.151,0.003)
  silkscreen extent -1.73,-1.31 1.47,0.91, body extent -1.85,-0.8 1.85,0.8, height 1.25
SOT23-5 [mm]
  round 0.5 on Mech15: 0(0,0)
  rrect25% 1x0.6 smd: 1(-1.3,0.95) 2(-1.3,0) 3(-1.3,-0.95) 4(1.3,-0.95) 5(1.3,0.95)
  silkscreen extent -0.51,-1.35 0.51,1.35, body extent -1.4,-1.45 1.4,1.45, height 1.44
SOT23-6 [mm]
  round 0.5 on Mech15: 0(0,0)
  rrect25% 1x0.6 smd: 1(-1.3,0.95) 2(-1.3,0) 3(-1.3,-0.95) 4(1.3,-0.95) 5(1.3,0) 6(1.3,0.95)
  silkscreen extent -0.51,-1.35 0.51,1.35, body extent -1.4,-1.45 1.4,1.45, height 1.44
SOT23-123 [mil]
  rect 36x36 smd: 1(0,0) 2(0,-75)
  rect 50x36 smd: 3(80,-38)
  silkscreen extent -25,-100 110,25, body extent -3,-95 94,20, height 41
SOT23-BCE [mil]
  rect 36x36 smd: B(0,0) E(0,-75)
  rect 50x36 smd: C(80,-38)
  silkscreen extent -25,-100 110,25, body extent -3,-95 94,20, height 41
"TACTILE SWITCH" [mil] "Tactile Switch 3X4X2"
  rect 39.37x55.12 smd: 1(-111,-1) 2(113,-1)
  silkscreen extent -122,-67 137,68, body extent -96,-59 102,59, height 76
TFP410 [mm] "LQFP-100"
  oval 0.28x1.6 smd paste+0 mask+0.051: 1(0.985,-0.715) 2(1.485,-0.715) 3(1.985,-0.715) 4(2.485,-0.715) 5(2.985,-0.715) 6(3.485,-0.715) 7(3.985,-0.715) 8(4.485,-0.715) 9(4.985,-0.715) 10(5.485,-0.715) 11(5.985,-0.715) 12(6.485,-0.715) 13(6.985,-0.715) 14(7.485,-0.715) 15(7.985,-0.715) 16(8.485,-0.715) 17(8.985,-0.715) 18(9.485,-0.715) 19(9.985,-0.715) 20(10.485,-0.715) 21(10.985,-0.715) 22(11.485,-0.715) 23(11.985,-0.715) 24(12.485,-0.715) 25(12.985,-0.715) 51(12.985,14.685) 52(12.485,14.685) 53(11.985,14.685) 54(11.485,14.685) 55(10.985,14.685) 56(10.485,14.685) 57(9.985,14.685) 58(9.485,14.685) 59(8.985,14.685) 60(8.485,14.685) 61(7.985,14.685) 62(7.485,14.685) 63(6.985,14.685) 64(6.485,14.685) 65(5.985,14.685) 66(5.485,14.685) 67(4.985,14.685) 68(4.485,14.685) 69(3.985,14.685) 70(3.485,14.685) 71(2.985,14.685) 72(2.485,14.685) 73(1.985,14.685) 74(1.485,14.685) 75(0.985,14.685)
  oval 1.6x0.28 smd paste+0 mask+0.051: 26(14.685,0.985) 27(14.685,1.485) 28(14.685,1.985) 29(14.685,2.485) 30(14.685,2.985) 31(14.685,3.485) 32(14.685,3.985) 33(14.685,4.485) 34(14.685,4.985) 35(14.685,5.485) 36(14.685,5.985) 37(14.685,6.485) 38(14.685,6.985) 39(14.685,7.485) 40(14.685,7.985) 41(14.685,8.485) 42(14.685,8.985) 43(14.685,9.485) 44(14.685,9.985) 45(14.685,10.485) 46(14.685,10.985) 47(14.685,11.485) 48(14.685,11.985) 49(14.685,12.485) 50(14.685,12.985) 76(-0.715,12.985) 77(-0.715,12.485) 78(-0.715,11.985) 79(-0.715,11.485) 80(-0.715,10.985) 81(-0.715,10.485) 82(-0.715,9.985) 83(-0.715,9.485) 84(-0.715,8.985) 85(-0.715,8.485) 86(-0.715,7.985) 87(-0.715,7.485) 88(-0.715,6.985) 89(-0.715,6.485) 90(-0.715,5.985) 91(-0.715,5.485) 92(-0.715,4.985) 93(-0.715,4.485) 94(-0.715,3.985) 95(-0.715,3.485) 96(-0.715,2.985) 97(-0.715,2.485) 98(-0.715,1.985) 99(-0.715,1.485) 100(-0.715,0.985)
  rect 5x5 smd paste+0 mask+0.051: 101(6.985,6.985)
  silkscreen extent -2.79,-2.79 16.74,16.81, body extent -1.09,-1.09 15.06,15.06, height 1.62
"USB MICRO" [mm]
  rect 1.854x0.4 smd paste+0 mask+0.051: 1(4.902,4.856) 2(4.902,4.206) 3(4.902,3.556) 4(4.902,2.906) 5(4.902,2.256)
  oval 2.5x1.8 hole 1 slot 1.7 at 0 deg paste-2539.97 mask+0.051: 6(2.032,7.366) 6(2.032,-0.127)
  oval 1.4x1.2 hole 0.8 slot 1 at 0 deg paste-2539.97 mask+0.051: 6(4.879,5.981) 6(4.879,1.131)
  silkscreen extent -0.17,-0.04 4.83,7.16, body extent -0.77,-0.77 5.13,7.88, height 2.8
"WCAP-ASLU 4x5.5x1" [mm] "Polarized capacitors, Aluminum Electrolytic Capacitors, 2-Leads, Body 4x5.5x1"
  rect 2.6x1.6 smd: 1(-1.8,0) 2(1.8,0)
  silkscreen extent -2.15,-2.15 2.15,2.15, body extent -2.5,-2.15 2.5,2.15, height 5.5

## Part data
AR1: library part AR?
BOOT OFF/ON RST: library part SW-PB-RED, "SW-D6-R / SW-DS-S / SW-14X14 / SW-7X7"
C1 C2: library part Res
C3 C8 C9 C17 C22 C26 C27 C35 C39 C48 C53: library part "Cap Pol1", "Polarized Capacitor (Radial)", LatestRevisionDate=17-Jul-2002, LatestRevisionNote="Re-released for DXP Platform.", PackageReference=RB7.6-15, Published=8-Jun-2000, Publisher="Altium Limited"
C4 C5 C6 C7 C10 C11 C12 C13 C14 C15 C16 C18 C19 C20 C21 C23 C24 C25 C28 C29 C31 C32 C33 C42 C44 C49 C50 C51 C52 C54 C55: library part C_0603, Manufacturer Part Number="0603 47pF", Package=0603, DrownBy=Xavi.Rocher, Revised=Oriol.Cos
C30 C34 C36 C45 C47: library part CAPC_1n8_50V_0805, "Capacitor SMD Cer 1.8nF 10% 50V X7R 0805", Manufacturer 1="AVX Corporation", Manufacturer Part Number 1=08055C182KAT2A, Operating Temperature="-55°C ~ 125°C", Package / Case="0805 (2012 metric)", Ratings="50V; X7R", Supplier Part Number 1=478-1374-1-ND, Tolerance=±10%, Supplier 1=Digi-Key
C37 C38 C40 C41 C46: library part Capacitor_ST, "Capacitor 0402 / 0603 / 0805", Revision="July-2002: Re-released for DXP Platform."
C43: library part CAP1206
D1 D2: library part RClamp0524PATCT_C40960, Breakdown Voltage=6V, JLCPCB Part Class="Extended Part", Manufacturer=SEMTECH, Maximum Clamping Voltage=15V, Operating Temperature=-55℃~+125℃@(Tj), Peak Pulse Power Dissipation (Ppp)@10/1000us=150W, Reverse Stand-Off Voltage (Vrwm)=5V, Add into BOM=yes, Convert to PCB=yes, Datasheet=https://atta.szlcsc.com/upload/public/pdf/source/20150124/1457707260739.pdf, Device=RClamp0524PATCT_C40960, LCSC Part Name=RClamp0524PATCT, Manufacturer Part=RClamp0524PATCT, Number of Lines=Quad, Supplier=LCSC, Supplier Footprint=DFN-10(1x2.5), Supplier Part=C40960, Symbol=RClamp0524PATCT, Type=ESD
D3 D4: library part BAT54S-SOT23, "DUAL SCHOTTKY DIODE SERIES", Current - Average Rectified (Io) (per Diode)="200mA (DC)", Current - Reverse Leakage @ Vr="2µA @ 25V", Manufacturer="NXP Semiconductors", Manufacturer Part Number=BAT54S,215, Package / Case="SOT-23-3, TO-236-3, Micro3™, SSD3, SST3", Supplier Part Number=568-1614-1-ND, Voltage - DC Reverse (Vr) (Max)=30V, Voltage - Forward (Vf) (Max) @ If="800mV @ 100mA", Category="Discrete Semiconductor Products", Diode Configuration="1 Pair Series Connection", Diode Type=Schottky, Mounting Type="Surface Mount", Packaging="Cut Tape (CT)", Reverse Recovery Time (trr)=5ns, RoHS="RoHS Compliant", Speed="Small Signal =< 200mA (Io), Any Speed", Supplier=Digi-Key, Supplier 1=Digi-Key, Supplier Part Number 1=568-1614-1-ND
D5 D6: "Schottky Power Rectifier, 2-Pin SOD-123, Pb-Free, Tape and Reel", Manufacturer="On Semiconductor", ComponentLink1Description="Manufacturer URL", ComponentLink1URL=http://www.onsemi.com/, ComponentLink2Description=Datasheet, ComponentLink2URL=http://www.onsemi.cn/pub_link/Collateral/MBR140SFT1-D.PDF, ComponentLink3Description="Package Specification", ComponentLink3URL=http://www.onsemi.cn/pub_link/Collateral/MBR120VLSFT1-D.PDF, Configuration=Single, DatasheetVersion="Rev. 5", IFSM Max (A)=30, Mounting Technology="Surface Mount", PackageDescription="2-Pin SOD, Body 1.65 x 2.7 mm", PackageReference=SOD-123FL-2-498-01, PackageVersion="Rev. A", Packing="Tape and Reel", PartNumber=MBR140SFT1G, RoHS=TRUE
DZ1 DZ2: library part "D Schottky", "Schottky Diode", Code_JEDEC=DO-214-AA, LatestRevisionDate=17-Jul-2002, LatestRevisionNote="Re-released for DXP Platform.", PackageReference=SMB, Published=8-Jun-2000, Publisher="Altium Limited"
EDID TTL: library part JST-4, "=Description"
FB1 FB2: "SMT Ferrite Chip"
FR1 FR2 FR3 FR4: library part "ferrite bead"
H1 H2 H3 H4: library part MOUNT-PAD-ROUND-HOLES, "MOUNTING PAD, round with holes around"
"HDMI IN": "HDMI SMT Horizontal with M3 screw WR-COM", ComponentLink1Description=Manufacturer, ComponentLink1URL=http://www.we-online.de, ComponentLink2Description=Datasheet, ComponentLink2URL=http://katalog.we-online.de/em/datasheet/685119135725.pdf, Construction=SMT, Gender=Receptacle, Interface Type="Type A", Part Number=685119135725, Published Date="April 2017", Publisher="Wurth Elektronik", Sub-Family=HDMI, Type=Horizontal
J1 J2: library part JUMP2
L1: library part "WE-HCI 1030, 744323020", "WE-HCI SMD Flat Wire High Current Inductor, Inductance = 0.20 μH", Inductance="0.20 μH", Manufacturer="Wurth Elektronik", partNo=744323020, ComponentLink1Description=Manufacturer, ComponentLink1URL=http://www.we-online.de, ComponentLink2Description=Datasheet, ComponentLink2URL=http://katalog.we-online.de/pbs/datasheet/744323020.pdf, ComponentLink3Description="New link", Created by="Baojun Chen", Created Date=Nov.2015
LD1: library part MCD-02900, "LED, Green, 2V, 25mA, 0603, SMD", Manufacturer=EVERLIGHT, Manufacturer_Part_Number=19-213SYGC/S530-E2/5T, Package=0603, Component_Country_Of_Origin=China, ComponentLink1URL=http://tunmcdsvn.tun.st.com/Component_Documentation_Library/Trunk/Display/EVERLIGHT_19-213SYGC-S530-E2-5T, Full_Alternate_Internal_Part_Number=MCD-00320, ID=5016, Internal_Part_Number=MCD-02900, Order_Code_Digikey=1080-19-213SYGC/S530-E2/5TTR-ND, Order_Code_Farnell=N/A, Order_Code_RS=N/A, Part_Preference=Recommended, Part_Type=Display, Partial_Alternate_Internal_Part_Number=MCD-00050, ShowFields=YES, Status=Checked
LD2: library part MCD-02899, "LED, Red, VF : Min=1.75V , Max=2.35V, 25mA, 0603", Manufacturer=EVERLIGHT, Manufacturer_Part_Number=19-213/R6C-AP1Q2B/5T, Package=0603, Component_Country_Of_Origin=China, ComponentLink1URL=http://tunmcdsvn.tun.st.com/Component_Documentation_Library/Trunk/Display/EVERLIGHT_19-213-R6C-AP1Q2B-5T, Full_Alternate_Internal_Part_Number=MCD-00049, ID=5015, Internal_Part_Number=MCD-02899, Order_Code_Digikey=1080-19-213/R6C-AP1Q2B/5TTR-ND, Order_Code_Farnell=N/A, Order_Code_RS=N/A, Part_Preference=Recommended, Part_Type=Display, ShowFields=YES, Status=Checked
Q1: "BC857 SMALL SIGNAL PNP BIPOLAR TRANSISTOR", Current - Collector (Ic) (Max)=100mA, Current - Collector Cutoff (Max)=15nA, DC Current Gain (hFE) (Min) @ Ic, Vce="420 @ 2mA, 5V", Frequency - Transition=200MHz, Manufacturer="Diodes Inc", Manufacturer Part Number=BC857C-7-F, Package / Case="SOT-23-3, TO-236-3, Micro3™, SSD3, SST3", Power - Max=300mW, Supplier Part Number=BC857C-FDICT-ND, Voltage - Collector Emitter Breakdown (Max)=45V, Category="Discrete Semiconductor Products", Mounting Type="Surface Mount", Packaging="Cut Tape (CT)", RoHS="RoHS Compliant", Supplier=Digi-Key, Supplier 1=Digi-Key, Supplier Part Number 1=BC857C-FDICT-ND, Transistor Type=PNP, Vce Saturation (Max) @ Ib, Ic="650mV @ 5mA, 100mA"
Q2: library part BC847, "NPN General-purpose Transistor", ComponentLink1Description="Manufacturer Link", ComponentLink1URL=http://www.semiconductors.philips.com/, ComponentLink2Description=Datasheet, ComponentLink2URL=http://www.semiconductors.philips.com/acrobat/datasheets/BC846_BC847_BC848_5.pdf, DatasheetVersion=4-Feb-2002, LatestRevisionDate=12-Dec-2006, LatestRevisionNote="IPC-7351 Footprint Added.", PackageDescription="3-Pin SOT-23 Package 0.95 mm Pitch, 2.3 mm Lead Span", PackageReference=SOT23, PackageVersion=May-1999, Published=17-Sep-2003, Publisher="Altium Limited"
R1 R2 R3 R5 R6 R7 R8 R9 R10 R11 R12 R13 R14 R15 R16 R29 R30 R31 R32 R36 R37 R38 R39 R40 R41 R42 R43: library part R_0603, Manufacturer Part Number="0603 10k", Package=0603, Automotive=Y, DrownBy=Xavi.Rocher, Revised=Oriol.Cos
R17 R18 R19 R20 R21 R22 R23 R24 R25 R26 R27 R28 R33 R34 R35: library part Res_12K1_1%_0603, "Resistor,12K1,0603,1%,VISHAY", Manuf_1=VISHAY, Manuf_Part_1="MCT 0603-50 1% P5 12K1", Distrib=FARNELL, ECCN_US/EU=n/a, Order=2325243
SPK VCC_USB: library part JST-2, "=Description"
TFT: library part TFT
TP1 TP2: library part CN?
U1: JLCPCB Part Class="Extended Part", LCSC Part Name="51系列 24MHz", Low-Voltage Detect=-, Manufacturer=WCH(南京沁恒), Operating Temperature Range=-40℃~+85℃, Operating Voltage Range=3.3V~5V, 8Bit Timer=-, 16Bit Timer=3, 32Bit Timer=-, ADC (Bit)=8bit, Add into BOM=yes, CAN=-, CCP Capture/Compare=有, communication protocol=-, Convert to PCB=yes, CPU Core=51系列, CPU Maximum Speed=24MHz, DAC (Bit)=-, Datasheet=https://atta.szlcsc.com/upload/public/pdf/source/20200819/C114295_E9D53870A65CF2BB015F3F56842BBF5E.pdf, Device=CH554G, Direct Memory Access=有, EEPROM=16KB, GPIO Ports Number=-, I2C=-, I2S=-, Infrared Data Association=-, Internal Comparator=-, Internal Oscillator=有, Manufacturer Part=CH554G, Name=CH554G, Peripheral/Function=DMA；看门狗；CCP捕获/比较；触控按键, Program Memory Type=FLASH, Program Storage Size=16KB, PWM (Bit)=8bit, RAM Size=1.25KB, Real-Time Clock=-, Secure Digital Input and Output=-, SPI=1, Supplier=LCSC, Supplier Footprint=SOP-16, Supplier Part=C114295, Symbol=CH554G, UART/USART=2, Universal Serial Bus=有, Watchdog=有
U2 U5 U6 U10: library part LD3985G33R, "150mA, Ultra-Low Drop Low Noise BiCMOS Voltage Regulators Low ESR Capacitors Compatible, 3.3V, 5-Pin TSOT23-5L", ComponentLink1Description="Manufacturer URL", ComponentLink1URL=http://www.st.com, ComponentLink2Description=Datasheet, ComponentLink2URL=http://www.st.com/internet/com/TECHNICAL_RESOURCES/TECHNICAL_LITERATURE/DATASHEET/CD00003395.pdf, DatasheetVersion=Jan-2011, PackageDescription="5-Pin SOT-23 Package, 2.9 x 1.6 mm Body, 0.95 mm Pitch, 2.8 mm Lead Span", PackageReference=TSOT23-5L, PackageVersion=2011, PartNumber=LD3985G33R
U3: library part EEPROM_I2C_MCP24AA32, "Microchip 32K (4K x 8) 1.8V I2C EEPROM   SOT23-5 [Digikey: 24AA32AFT-I/OTCT-ND]", DeviceSetName=EEPROM_I2C_MCP24AA32, GateName_1=G$1, LibraryName=microbuilder, SymbolName_1=MCP24AA32
U4: library part TFP401APZP
U7: library part AP3031
U9: library part LTK8002B
USB: JLCPCB Part Class="Extended Part", Manufacturer="XKB Enterprise", Manufacturer Part=U254-051T-4BH23-S2B, Contributor=LCSC, spicePre=U, spiceSymbolName=U254-051T-4BH23-S2B, Supplier=LCSC, Supplier Part=C319164
L2: Code_IEC=1005, Code_JEITA=0402, LatestRevisionDate=29-May-2009, LatestRevisionNote="IPC-7351 Footprint Added.", PackageDescription="Chip Inductor", PackageReference=0402-A, Published=8-Jun-2000, Publisher="Altium Limited"

## Free pads (board coordinates)
  round 60 hole 30: 2(1946,1782) 3(1849,1780) 4(1753,1780) 5(1648,1778)

## Via types
v1: diameter 19.68, hole 11.81, L1 to L4, tented both sides, 252 vias
v2: diameter 39.37, hole 27.56, L1 to L4, tented both sides, 32 vias